# EAGLE board InstantPizza (EAGLE 6.5.0)
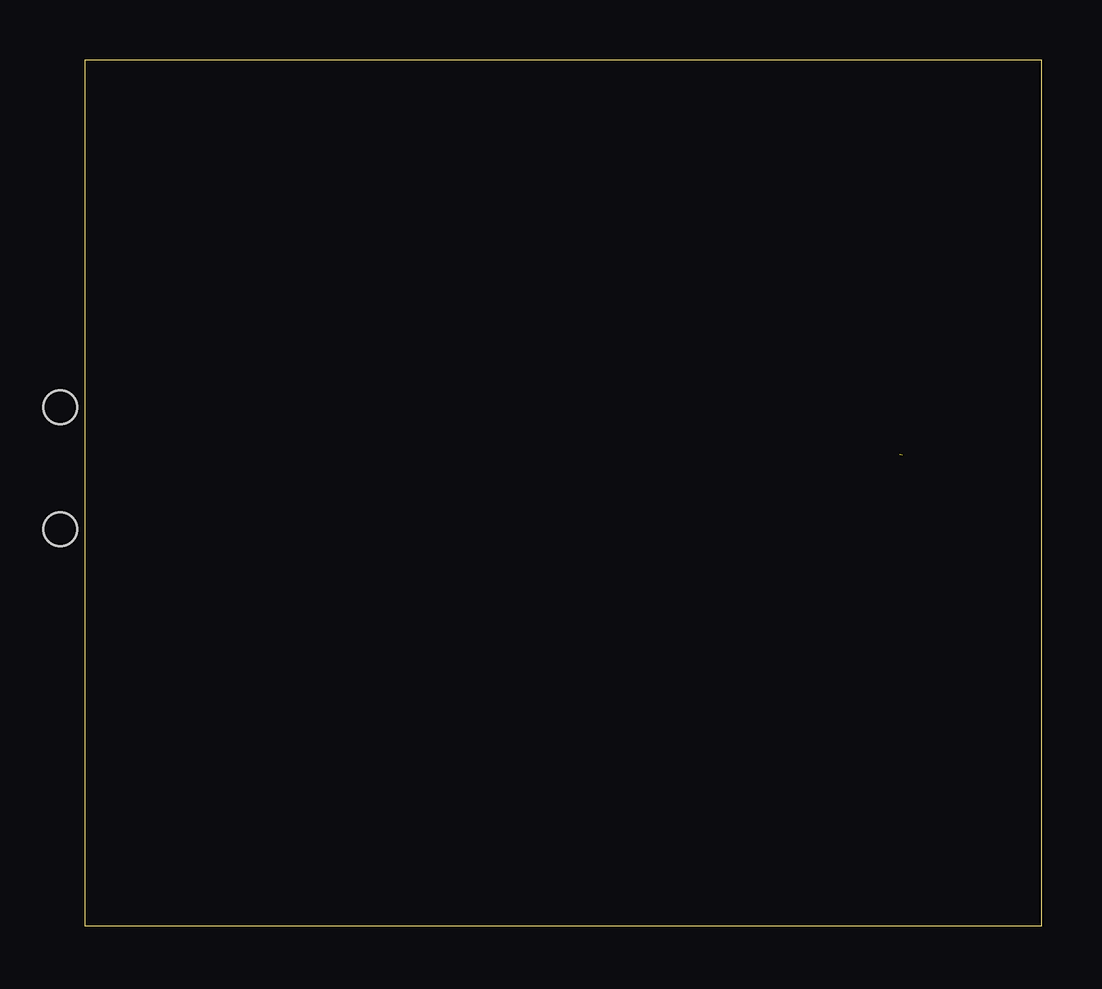
[diagram p0: board, top side]
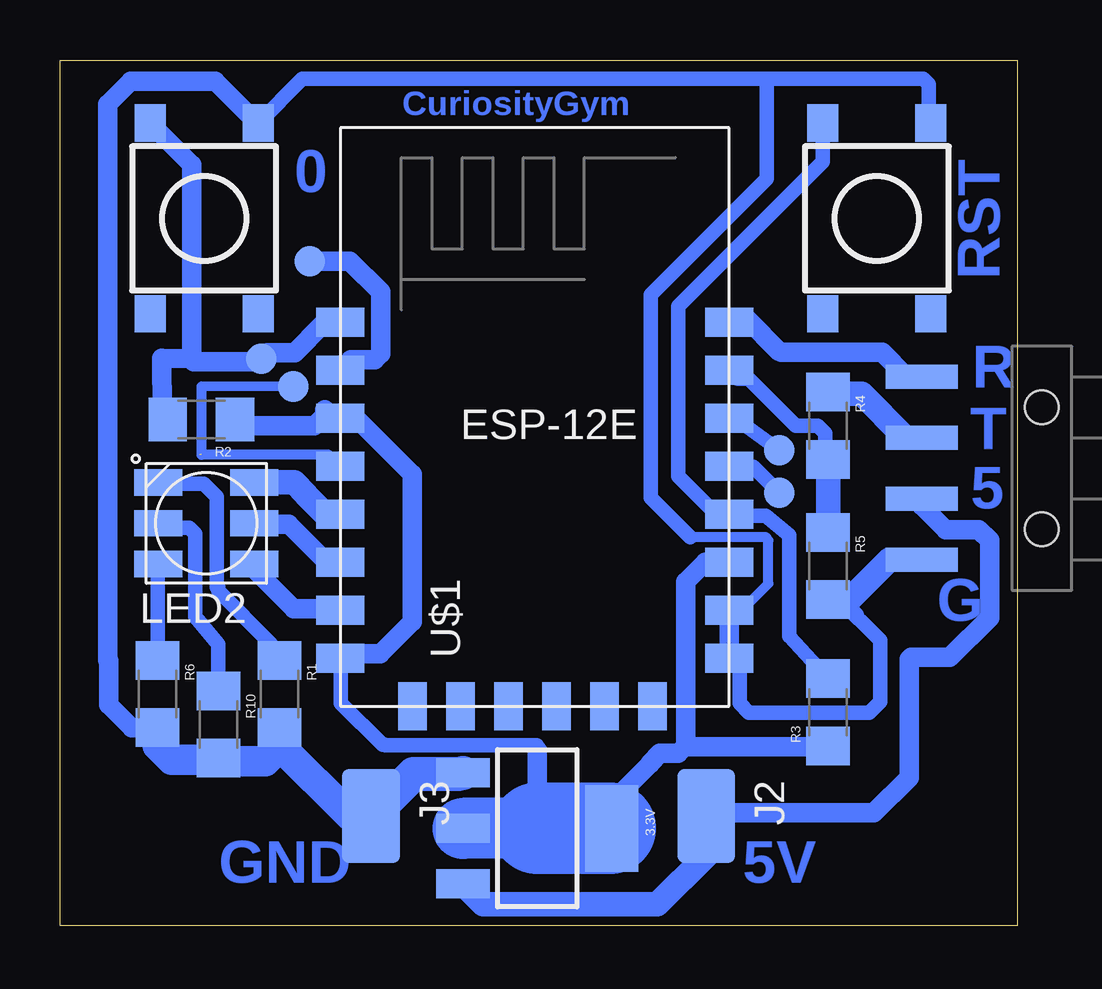
[diagram p1: board, bottom side, seen from below]

Size 39.88 x 36.07 mm. Coordinates in mm from the lower left corner, seen from the top.
Outline: 0,0 39.88,0 39.88,36.07 0,36.07 0,0
Copper layers (1*16): Top 0.035mm / dielectric 1.5mm / Bottom 0.035mm
Design rules "default *": minimum track width 56mil, minimum drill 24mil, track to track 5mil, track to pad 5mil, pad to pad 5mil, via to via 5mil, smd to smd 5mil, copper to edge 40mil, drill to drill 8mil, minimum pad ring 10mil, minimum via ring 8mil, stop-mask expansion 4mil, vias tented up to drill 0mil, thermal gap 10mil

## Footprints (pad centres in the part's own frame; a part is rotated, then mirrored left to right if it is on the bottom)
SOT223 = smd 1.219 x 2.235: 1 -2.311,-3.099; 2 0,-3.099; 3 2.311,-3.099 | smd 3.6 x 2.2: 4 0,3.099
1X04-SMD = smd 1 x 3: 1 -3.81,5; 2 -1.27,5; 3 1.27,5; 4 3.81,5 | hole 1.4: -2.54,0; 2.54,0
LUXEON-PAD = smd 3.9 x 2.4: P$1 0,0
RGBLED5050 = smd 2 x 1.1: 1 -2,1.7; 2 -2,0; 3 -2,-1.7; 4 2,-1.7; 5 2,0; 6 2,1.7
1206 = smd 1.6 x 1.8: 1 -1.4,0; 2 1.4,0
TACTILE_SWITCH_TALL = smd 1.55 x 1.3: A1 -3.975,-2.25; A2 3.975,-2.25; B1 -3.975,2.25; B2 3.975,2.25
PAD.03X.05 = smd 1.27 x 1.27: P$1 0,0
ESP8266-ESP12E = smd 2 x 1.2: 1 0,16; 2 0,14; 3 0,12; 4 0,10; 5 0,8; 6 0,6; 7 0,4; 8 0,2; 9 16.2,2; 10 16.2,4; 11 16.2,6; 12 16.2,8; 13 16.2,10; 14 16.2,12; 15 16.2,14; 16 16.2,16 | smd 1.2 x 2: 17 11,0; 18 3,0; 19 5,0; 20 13,0; 21 7,0; 22 9,0

## Placement (x,y rotation side)
3.3V  [SOT223]  19.99,4.05 270 bottom
J1  [1X04-SMD]  -1.04,19.05 90 bottom
J2  [LUXEON-PAD]  12.95,4.57 270 bottom
J3  [LUXEON-PAD]  26.92,4.57 270 bottom
LED2  RGBLED5050  [RGBLED5050]  33.78,16.76 180 bottom
R1  10k  [1206]  30.73,9.65 270 bottom
R2  10k  [1206]  33.99,21.09 180 bottom
R3  10k  [1206]  7.87,8.89 90 bottom
R4  10k  [1206]  7.87,20.83 270 bottom
R5  20k  [1206]  7.87,14.99 270 bottom
R6  10k  [1206]  35.81,9.65 270 bottom
R10  10k  [1206]  33.27,8.38 270 bottom
S1  SWITCH-MOMENTARY-2SMD-4  [TACTILE_SWITCH_TALL]  33.87,29.46 90 bottom
S2  SWITCH-MOMENTARY-2SMD-4  [TACTILE_SWITCH_TALL]  5.84,29.46 90 bottom
TP2  TEST-POINT3X5  [PAD.03X.05]  31.5,23.62 0 bottom
TP3  TEST-POINT3X5  [PAD.03X.05]  30.17,22.46 0 bottom
TP4  TEST-POINT3X5  [PAD.03X.05]  9.91,19.81 0 bottom
TP5  TEST-POINT3X5  [PAD.03X.05]  29.46,27.69 0 bottom
TP6  TEST-POINT3X5  [PAD.03X.05]  9.91,18.03 0 bottom
U$1  [ESP8266-ESP12E]  28.19,9.14 0 bottom

## Library data of the parts
3.3V = SparkFun-PowerIC; PROD_ID: VREG-08170
J1-J3 = SparkFun-Connectors
LED2 = adafruit
R1-R6 R10 TP2-TP6 = SparkFun-Passives
S1 S2 = SparkFun-Electromechanical; PROD_ID: SWCH-11966
U$1 = esp826612e

## Nets
3.3: 3.3V.2 3.3V.4 R2.1 R3.1 U$1.3 U$1.8 U$1.11
5V: 3.3V.3 J1.2 J2.P$1
ADC: TP5.P$1 U$1.2
BLUE: LED2.3 U$1.5
GND: 3.3V.1 J1.1 J3.P$1 R1.2 R5.2 R6.2 R10.2 S1.A2 S2.A2 U$1.9 U$1.10
GPIO0: R3.2 S2.B2 U$1.12
GPIO5: TP4.P$1 U$1.14
GPIO16: TP3.P$1 U$1.4
GREEN: LED2.1 U$1.7
N$1: TP6.P$1 U$1.13
N$2: LED2.6 R6.1
N$5: LED2.4 R1.1
N$6: LED2.5 R10.1
RED: LED2.2 U$1.6
RST: R2.2 S1.B2 TP2.P$1 U$1.1
RXD_5: J1.4 U$1.16
RXD_ESP: R4.2 R5.1 U$1.15
TXD_5: J1.3 R4.1

## Tracks (layer width: path | path; a pad name or v marks a point on that pad's centre or on a via)
3.3
  Bottom 0.305: 28.6,21.57 28.19,21.16 U$1.3 | 28.07,11.15 U$1.8 27.99,11.02 | 28.07,21.13 U$1.3 | 16.89,4.12 3.3V.4 | 7.87,7.47 R3.1 | 3.3V.2 | 31.95,21.49 32.61,20.83 R2.1 | 28.85,21.49 U$1.3 | U$1.3 27.91,21.13 27.81,21.13 27.63,21.17 | 20.35,7.52 19.99,7.31
  Bottom 0.406: 28.73,21.57 U$1.3 | 7.98,7.38 R3.1
  Bottom 0.61: 20,7.52 20.35,7.52 26.34,7.52 26.34,7.53 26.43,7.53 28.17,9.27 28.17,11.12 U$1.8
  Bottom 0.813: 28.85,21.49 28.85,21.26 29.29,20.83 32.64,20.83 R2.1 | 27.63,21.17 27.55,21.17 25.19,18.81 25.19,12.66 26.53,11.33 28.01,11.33 U$1.8 | 16.95,4.06 16.89,4.12 16.89,5.14 15.29,6.74 15.29,6.77 14.89,7.18 14.11,7.18 13.8,7.49 | 19.99,4.06 19.99,7.31 20,7.31 | U$1.11 12.99,15.14 13.8,14.34 13.8,7.49 | 13.8,7.49 13.77,7.46 7.9,7.46 R3.1
  Bottom 2.54: 19.99,4.06 3.3V.2
  Bottom 3.81: 16.95,4.06 19.99,4.06
5V
  Bottom 0.305: 3.3V.3 | 12.83,4.65 J2.P$1 | 12.75,4.78 J2.P$1 | 12.62,4.85 J2.P$1 | 12.5,4.78 J2.P$1 | 3.96,17.5 J1.2
  Bottom 0.61: 3.96,17.5 3.96,17.49 | 4.41,11.17 4.49,11.09 | 12.42,4.69 12.5,4.78
  Bottom 0.813: 4.41,11.17 2.81,11.17 1.14,12.84 1.14,16.05 1.59,16.5 2.97,16.5 3.96,17.49 | 4.49,11.09 4.49,6.17 5.96,4.69 12.42,4.69 | 22.73,1.38 3.3V.3
  Bottom 1.016: J2.P$1 12.95,2.92 14.99,0.89 22.24,0.89 3.3V.3
ADC
  Bottom 0.305: 28.19,23.16 U$1.2 | 28.07,23.16 U$1.2 | 27.91,23.16 U$1.2
  Bottom 0.813: TP5.P$1 27.8,27.69 26.52,26.41 26.52,23.82 26.76,23.58 27.76,23.58 U$1.2
BLUE
  Bottom 0.305: 31.39,18.44 31.78,18.44 LED2.3
  Bottom 1.016: U$1.5 28.83,17.14 29.62,17.93 29.62,17.96 30.12,18.47 LED2.3
GND
  Bottom 0.305: 35.81,8.23 R6.2 35.89,8.38 35.89,8.92 | 33.4,7.06 R10.2 | 23.11,6.35 3.3V.1 | 30.61,8.15 R1.2 | 27.05,4.6 J3.P$1 | U$1.9 11.84,11.1 | 11.99,13.13 U$1.10 11.86,13.21 11.81,13.21 | 3.61,33.45 S2.A2 | 31.75,33.53 S1.A2 31.6,33.91 31.86,33.64 | 7.11,13.46 7.21,13.48 R5.2
  Bottom 0.381: 11.68,13.39 U$1.10
  Bottom 0.406: U$1.10 | S2.A2 3.68,33.44 | 10.44,35.13 10.34,35.23 | 11.68,13.39 11.23,13.39 10.36,14.25 10.36,16.05 10.44,16.18 13.61,16.18 | 15.27,18.36 15.27,18.24
  Bottom 0.61: 6.69,12.96 7.21,13.48 | R5.2 7.4,13.59 5.71,11.89 5.71,9.33 6.16,8.88 11.18,8.88 11.56,9.26 11.56,10.71 U$1.9 | 15.27,18.36 15.27,26.29 10.44,31.12 10.44,35.13 | 15.27,18.24 15.27,17.83 13.61,16.18 | 3.68,33.44 3.68,35.05 3.91,35.28 10.29,35.28 | 10.29,35.28 29.78,35.28 S1.A2 | 10.29,35.28 10.34,35.23
  Bottom 0.813: U$1.9 U$1.10 | 31.64,33.58 31.8,33.58 31.86,33.64 33.4,35.18 36.93,35.18 37.89,34.23 37.89,32.52 37.88,32.51 37.88,11.06 37.86,11.04 37.86,9.21 36.9,8.25 R6.2 35.81,7.73 | 33.4,7.06 33.7,7.36 | 30.61,8.15 30.51,8.15
  Bottom 1.016: J1.1 5.33,15.24 7.11,13.46
  Bottom 1.27: 30.51,8.15 30.51,7.67 30.7,7.48 | 30.7,7.48 31.32,6.86 33.15,6.86 R10.2 33.35,6.91 35.23,6.91 35.81,7.49 35.81,7.73 | 27.05,4.6 27.81,4.6 30.7,7.48
  Bottom 1.422: 3.3V.1 23.27,6.33 25.15,6.33 26.52,4.95 J3.P$1
GPIO0
  Bottom 0.305: 11.07,17.07 11.86,17.07 U$1.12 | 7.87,10.31 R3.2 7.95,10.44 | S2.B2
  Bottom 0.61: 11.07,17.07 10.47,17.07 9.49,16.26 9.49,12.07 R3.2 | S2.B2 | S2.B2 8.1,31.83 14.12,25.81 14.12,18.72 12.62,17.22 12.07,17.22 U$1.12
GPIO5
  Bottom 0.305: 11.73,21.13 U$1.14
  Bottom 0.61: 11.73,21.13 TP4.P$1
GPIO16  (2 unrouted)
  Bottom 0.406: U$1.4 28.67,19.62 33.98,19.62 33.98,22.47 TP3.P$1
GREEN
  Bottom 0.305: 28.19,13.16 U$1.7 | LED2.1
  Bottom 0.813: 28.19,13.16 28.25,13.21 30.14,13.21 31.78,14.85 LED2.1
N$1
  Bottom 0.305: 11.99,19.13 U$1.13
  Bottom 0.61: TP6.P$1 11,19.13 11.99,19.13
N$2
  Bottom 0.305: 35.81,15.04 LED2.6
  Bottom 0.61: 35.81,15.04 R6.1
N$5
  Bottom 0.61: LED2.4 35.72,18.4 33.88,18.4 33.36,17.88 33.36,14.09 33.29,14.09 33.29,13.95 31.09,11.74 31.09,11.41 R1.1
N$6
  Bottom 0.305: LED2.5 35.41,16.76 | 33.29,9.8 R10.1
  Bottom 0.61: 33.29,9.8 33.29,11.72 34.25,12.87 34.25,16.33 34.49,16.58 35.59,16.58 LED2.5
RED
  Bottom 0.305: LED2.2 31.42,16.76 | 28.19,15.16 U$1.6
  Bottom 0.813: 31.42,16.76 31.39,16.73 30.35,16.73 28.78,15.16 | 28.78,15.16 | 28.19,15.16 28.21,15.15 28.21,15.11 28.26,15.16 28.78,15.16 | 28.78,15.16 28.79,15.15 28.79,15.11
RST
  Bottom 0.305: 35.43,20.83 R2.2 | 31.57,23.5 TP2.P$1 31.37,23.7 31.22,23.85 | S1.B2 | 34.39,23.62 34.31,23.5
  Bottom 0.813: 34.31,23.5 31.62,23.5 TP2.P$1 31.24,23.88 30.1,23.88 28.92,25.05 28.28,25.05 U$1.1 | R2.2 35.44,21.23 35.62,21.42 35.64,23.64 34.39,23.62 34.39,31.71 S1.B2
RXD_5
  Bottom 0.305: 11.99,25.12 U$1.16 11.86,25.2 11.43,25.2 11.23,25.24 | 3.99,22.89 J1.4 4.14,22.94
  Bottom 0.406: 4.14,22.94 4.68,22.94
  Bottom 0.813: 4.68,22.94 5.63,23.89 9.84,23.89 9.89,23.94 9.94,23.94 11.23,25.24
RXD_ESP
  Bottom 0.305: 8,19.76 R4.2
  Bottom 0.61: 8,19.76 8,20.52 8.31,20.83 9.22,20.83 11.18,22.78 11.63,22.78 U$1.15
  Bottom 1.016: R4.2 R5.1
TXD_5
  Bottom 0.305: 7.87,22.48 R4.1 | 3.99,20.34 J1.3
  Bottom 0.406: 3.99,20.34 4.67,20.34 | 7.83,22.19 R4.1
  Bottom 0.813: 4.67,20.34 4.67,20.35 | 7.8,22.16 R4.1
  Bottom 1.016: 7.8,22.16 6.48,22.16 4.67,20.35

## Text on the board
Bottom: CuriosityGym | RST | 0 | R | T | 5 | G | 5V | GND